# Altium PCB WCH_hairDrierCore_V1.5.PcbDoc (part 6 of 7)
Units mil, origin at the board's own origin, x right, y up, seen from the top; angles counter-clockwise.
Board outline 1683.54 x 992.13 mil, 4 copper layers (Top Layer, Mid-Layer 1, Mid-Layer 2, Bottom Layer); 84 components, 65 nets, 249 pads, 160 vias.
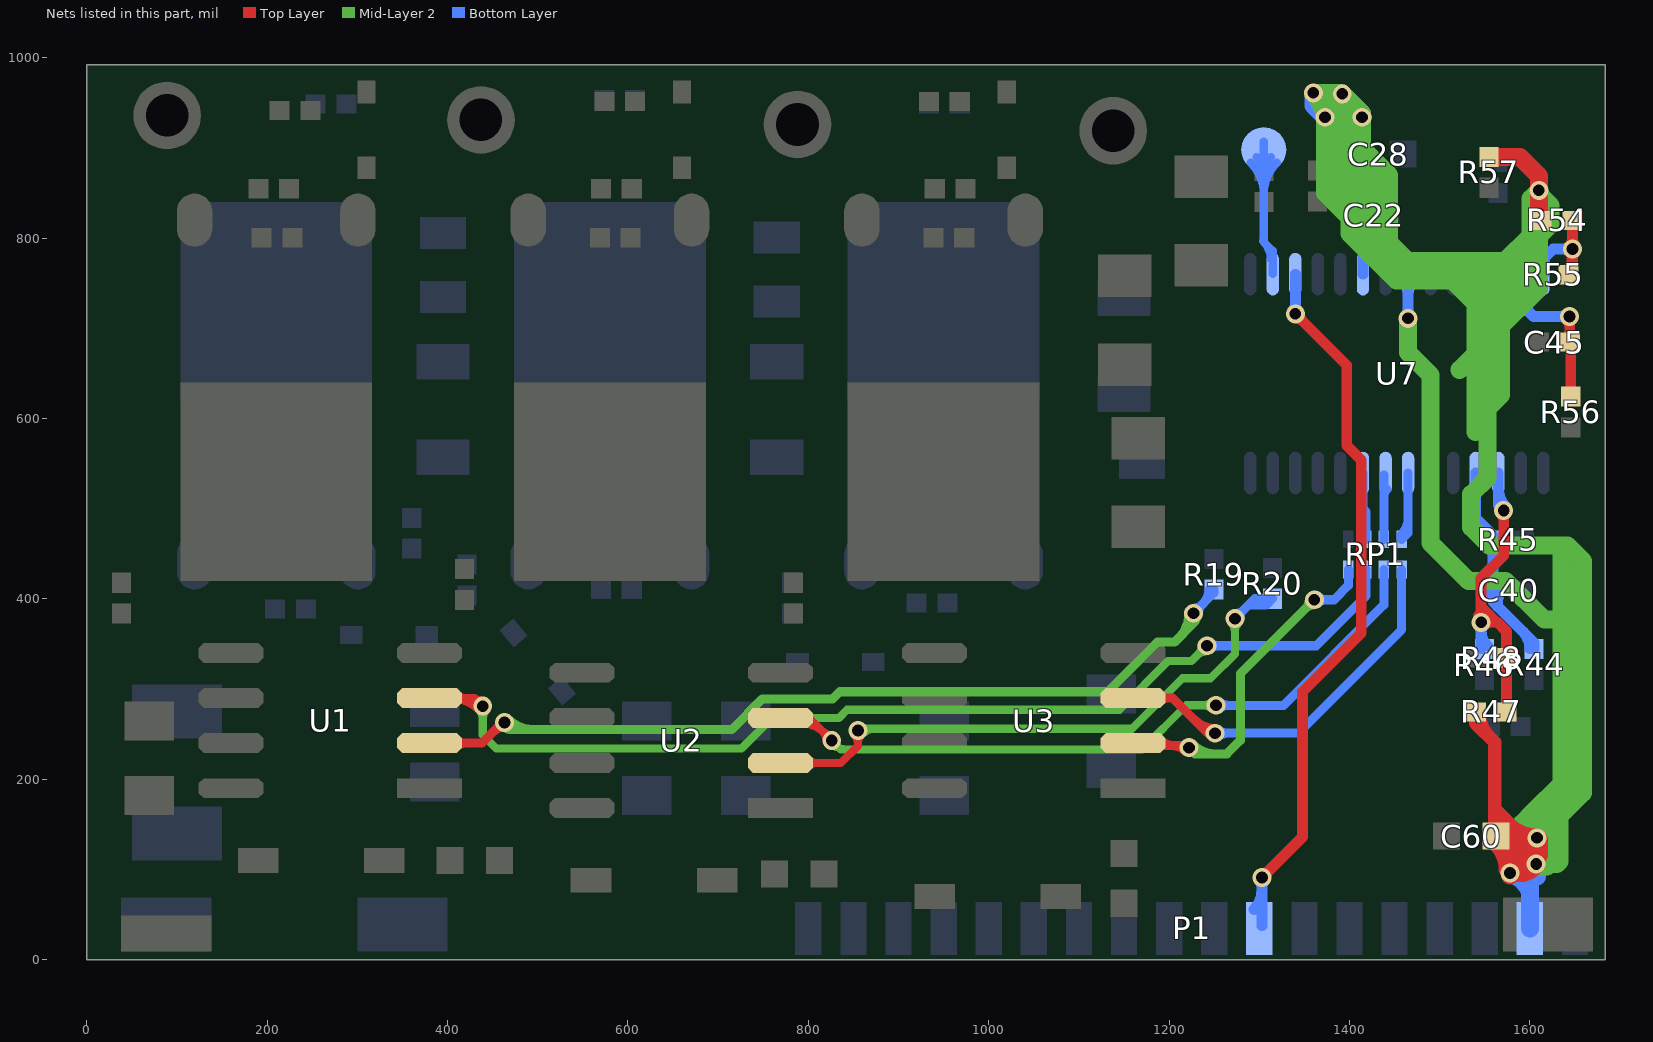
[diagram p8: the nets of this part, all layers, seen from the top]

## Via types
v1: diameter 21, hole 13, Top Layer to Bottom Layer, tented both sides, 155 vias
v2: diameter 25, hole 15, Top Layer to Bottom Layer, tented both sides, 5 vias

## Nets (pads, with @x,y where several pads share a name; then routed paths per layer and width w, separated by ;. In a path a pad name is that pad's centre, name@x,y a point inside that pad or via, vN(x,y) a via of type N, cw(c..) or ccw(c..) an arc to the next point about the centre after c; other vN are vias at no path point) (continued)
NetRP1_2: RP1.2 U7.23 | length 74.9
  Bottom Layer w10: U7.23@1415,539.53 1415,500 1418.53,496.47 RP1.2@1418.53,466.06
NetRP1_3: RP1.3 U7.22 | length 96.7
  Bottom Layer w10: RP1.3@1438.21,466.06 U7.22@1438.21,537.59 ; 1438.21,513.91 cw(c1448.88,513.91) U7.22@1441.34,521.46 ; 1438.21,513.91 cw(c1448.88,513.91) U7.22@1441.34,521.46 ; 1438.21,513.91 cw(c1448.88,513.91) U7.22@1441.34,521.46
NetRP1_4: RP1.4 U7.21 | length 138.7
  Bottom Layer w10: RP1.4@1457.9,466.06 1465,473.16 U7.21@1465,539.53 ; RP1.4@1457.26,470.73 ccw(c1438.57,489.42) 1465,489.42 ; RP1.4@1457.26,470.73 ccw(c1438.57,489.42) 1465,489.42 ; RP1.4@1457.26,470.73 ccw(c1438.57,489.42) 1465,489.42
OPA1_N1: C45.2 R56.2 U7.13 | length 395.9
  Top Layer w12: C45.2@1644.22,684.63 v1@1644.22,713 ; R56.2@1645.37,624.21 C45.2@1645.37,683.47 ; v1@1640.82,709.82 cw(c1632.62,701.62) 1644.22,701.62 ; v1@1640.82,709.82 cw(c1632.62,701.62) 1644.22,701.62 ; v1@1640.82,709.82 cw(c1632.62,701.62) 1644.22,701.62 ; C45.2@1640.94,687.9 ccw(c1633.04,695.81) 1644.22,695.81 ; C45.2@1640.94,687.9 ccw(c1633.04,695.81) 1644.22,695.81 ; C45.2@1640.94,687.9 ccw(c1633.04,695.81) 1644.22,695.81 ; C45.2@1641.45,681.36 cw(c1631.97,671.88) 1645.37,671.88 ; C45.2@1641.45,681.36 cw(c1631.97,671.88) 1645.37,671.88 ; C45.2@1641.45,681.36 cw(c1631.97,671.88) 1645.37,671.88 ; R56.2@1642.1,627.99 ccw(c1634.19,635.9) 1645.37,635.9 ; R56.2@1642.1,627.99 ccw(c1634.19,635.9) 1645.37,635.9 ; R56.2@1642.1,627.99 ccw(c1634.19,635.9) 1645.37,635.9 ; 1644.22,695.81 ccw(c1655.39,695.81) C45.2@1647.49,687.9 ; 1644.22,695.81 ccw(c1655.39,695.81) C45.2@1647.49,687.9 ; 1644.22,695.81 ccw(c1655.39,695.81) C45.2@1647.49,687.9 ; 1645.37,635.9 ccw(c1656.55,635.9) R56.2@1648.64,627.99 ; 1645.37,635.9 ccw(c1656.55,635.9) R56.2@1648.64,627.99 ; 1645.37,635.9 ccw(c1656.55,635.9) R56.2@1648.64,627.99
  Bottom Layer w12: U7.13@1590,760 1590,727 1604,713 v1(1644,713) ; 1633.14,713 cw(c1633.14,702.14) v1@1640.82,709.82 ; 1633.14,713 ccw(c1633.14,723.86) v1@1640.82,716.18 ; 1633.14,713 cw(c1633.14,702.14) v1@1640.82,709.82 ; 1633.14,713 ccw(c1633.14,723.86) v1@1640.82,716.18 ; 1633.14,713 ccw(c1633.14,723.86) v1@1640.82,716.18 ; 1633.14,713 cw(c1633.14,702.14) v1@1640.82,709.82
OPA1_P1: R54.2 R55.1 U7.14 | length 367.2
  Top Layer w12: R55.1@1647.22,763.72 R54.2@1647.22,813.63 ; R55.1@1640.1,762.64 ccw(c1622.91,779.83) v1@1647.22,779.83 ; R55.1@1640.1,762.64 ccw(c1622.91,779.83) v1@1647.22,779.83 ; R55.1@1640.1,762.64 ccw(c1622.91,779.83) v1@1647.22,779.83 ; R54.2@1643.94,816.36 cw(c1636.04,808.45) 1647.22,808.45 ; R54.2@1643.94,816.36 cw(c1636.04,808.45) 1647.22,808.45 ; R54.2@1643.94,816.36 cw(c1636.04,808.45) 1647.22,808.45 ; v1@1644.03,784.82 cw(c1636.35,777.14) 1647.22,777.14 ; v1@1644.03,784.82 cw(c1636.35,777.14) 1647.22,777.14 ; v1@1644.03,784.82 cw(c1636.35,777.14) 1647.22,777.14 ; v1@1644.03,791.18 ccw(c1636.35,798.86) 1647.22,798.86 ; v1@1644.03,791.18 ccw(c1636.35,798.86) 1647.22,798.86 ; v1@1644.03,791.18 ccw(c1636.35,798.86) 1647.22,798.86 ; 1647.22,777.14 cw(c1658.08,777.14) v1@1650.4,784.82 ; 1647.22,777.14 cw(c1658.08,777.14) v1@1650.4,784.82 ; 1647.22,777.14 cw(c1658.08,777.14) v1@1650.4,784.82 ; 1647.22,798.86 ccw(c1658.08,798.86) v1@1650.4,791.18 ; 1647.22,798.86 ccw(c1658.08,798.86) v1@1650.4,791.18 ; 1647.22,798.86 ccw(c1658.08,798.86) v1@1650.4,791.18 ; 1647.22,808.45 cw(c1658.39,808.45) R54.2@1650.49,816.36 ; 1647.22,808.45 cw(c1658.39,808.45) R54.2@1650.49,816.36 ; 1647.22,808.45 cw(c1658.39,808.45) R54.2@1650.49,816.36
  Bottom Layer w12: U7.14@1615,760 1615,777 1626,788 v1(1647.22,788) ; 1636.35,788 cw(c1636.35,777.14) v1@1644.03,784.82 ; 1636.35,788 ccw(c1636.35,798.86) v1@1644.03,791.18 ; 1636.35,788 cw(c1636.35,777.14) v1@1644.03,784.82 ; 1636.35,788 ccw(c1636.35,798.86) v1@1644.03,791.18 ; 1636.35,788 ccw(c1636.35,798.86) v1@1644.03,791.18 ; 1636.35,788 cw(c1636.35,777.14) v1@1644.03,784.82
OPA2_N0: C40.2 R44.2 R45.1 U7.18 | length 596.8
  Bottom Layer w12: U7.18@1540,539.53 1540,489.51 1559.14,470.37 C40.2@1559.14,409 ; C40.2@1559.78,409.63 1559.78,396.22 1565.5,390.5 1604.63,351.37 R44.2@1604.63,344.22 ; 1564,391.59 C40.2@1564,405 ; 1546.83,482.67 cw(c1529.53,465.37) R45.1@1554,465.37 ; 1546.83,482.67 cw(c1529.53,465.37) R45.1@1554,465.37 ; 1546.83,482.67 cw(c1529.53,465.37) R45.1@1554,465.37 ; R45.1@1555.86,462.1 cw(c1547.96,454.19) 1559.13,454.19 ; R45.1@1555.86,462.1 cw(c1547.96,454.19) 1559.13,454.19 ; R45.1@1555.86,462.1 cw(c1547.96,454.19) 1559.13,454.19 ; C40.2@1556.01,412.9 ccw(c1548.45,420.46) 1559.13,420.46 ; C40.2@1556.01,412.9 ccw(c1548.45,420.46) 1559.13,420.46 ; C40.2@1556.01,412.9 ccw(c1548.45,420.46) 1559.13,420.46 ; C40.2@1556.51,406.36 cw(c1548.61,398.45) 1559.78,398.45 ; C40.2@1556.51,406.36 cw(c1548.61,398.45) 1559.78,398.45 ; C40.2@1556.51,406.36 cw(c1548.61,398.45) 1559.78,398.45 ; C40.2@1557.24,406.15 cw(c1544.12,391.21) 1564,391.21 ; C40.2@1557.24,406.15 cw(c1544.12,391.21) 1564,391.21 ; C40.2@1557.24,406.15 cw(c1544.12,391.21) 1564,391.21 ; 1559.13,421.16 ccw(c1570.81,421.16) C40.2@1562.55,412.9 ; 1559.13,421.16 ccw(c1570.81,421.16) C40.2@1562.55,412.9 ; 1559.13,421.16 ccw(c1570.81,421.16) C40.2@1562.55,412.9 ; 1559.14,454.19 cw(c1570.31,454.19) R45.1@1562.41,462.1 ; 1559.14,454.19 cw(c1570.31,454.19) R45.1@1562.41,462.1 ; 1559.14,454.19 cw(c1570.31,454.19) R45.1@1562.41,462.1 ; 1559.78,397.23 cw(c1572.69,397.23) C40.2@1563.56,406.36 ; 1559.78,397.23 cw(c1572.69,397.23) C40.2@1563.56,406.36 ; 1559.78,397.23 cw(c1572.69,397.23) C40.2@1563.56,406.36 ; 1559.78,398.45 cw(c1570.96,398.45) C40.2@1563.06,406.36 ; 1559.78,398.45 cw(c1570.96,398.45) C40.2@1563.06,406.36 ; 1559.78,398.45 cw(c1570.96,398.45) C40.2@1563.06,406.36 ; 1592.02,363.98 cw(c1572.77,344.72) R44.2@1600,344.72 ; 1592.02,363.98 cw(c1572.77,344.72) R44.2@1600,344.72 ; 1592.02,363.98 cw(c1572.77,344.72) R44.2@1600,344.72
OPA2_P1: R46.2 R47.2 R48.2 U7.17 | length 897.9
  Top Layer w12: 1563,374 1546,391 ; v1(1571,498) 1571,448 1546,423 1546,391 ; R47.2@1574.22,274.63 R48.2@1574.22,334.63 1574.22,363.78 1564,374 v1(1546,374) 1546,391 ; v1@1542.82,377.18 ccw(c1535.14,384.86) 1546,384.86 ; v1@1542.82,377.18 ccw(c1535.14,384.86) 1546,384.86 ; v1@1542.82,377.18 ccw(c1535.14,384.86) 1546,384.86 ; v1@1542.95,380.85 cw(c1548.87,367.56) 1559.15,377.85 ; v1@1542.95,380.85 cw(c1548.87,367.56) 1559.15,377.85 ; v1@1542.95,380.85 cw(c1548.87,367.56) 1559.15,377.85 ; 1546,384.86 ccw(c1556.86,384.86) v1@1549.18,377.18 ; 1546,384.86 ccw(c1556.86,384.86) v1@1549.18,377.18 ; 1546,384.86 ccw(c1556.86,384.86) v1@1549.18,377.18 ; v1@1549.18,370.82 cw(c1556.86,363.14) 1556.86,374 ; v1@1549.18,370.82 cw(c1556.86,363.14) 1556.86,374 ; v1@1549.18,370.82 cw(c1556.86,363.14) 1556.86,374 ; v1@1549.18,377.18 ccw(c1556.86,384.86) 1556.86,374 ; v1@1549.18,377.18 ccw(c1556.86,384.86) 1556.86,374 ; v1@1549.18,377.18 ccw(c1556.86,384.86) 1556.86,374 ; v1@1567.82,494.82 cw(c1560.14,487.14) 1571,487.14 ; v1@1567.82,494.82 cw(c1560.14,487.14) 1571,487.14 ; v1@1567.82,494.82 cw(c1560.14,487.14) 1571,487.14 ; R47.2@1570.94,277.9 ccw(c1563.04,285.81) 1574.22,285.81 ; R47.2@1570.94,277.9 ccw(c1563.04,285.81) 1574.22,285.81 ; R47.2@1570.94,277.9 ccw(c1563.04,285.81) 1574.22,285.81 ; R48.2@1570.94,331.36 cw(c1563.04,323.45) 1574.22,323.45 ; R48.2@1570.94,331.36 cw(c1563.04,323.45) 1574.22,323.45 ; R48.2@1570.94,331.36 cw(c1563.04,323.45) 1574.22,323.45 ; R48.2@1570.94,337.9 ccw(c1563.04,345.81) 1574.22,345.81 ; R48.2@1570.94,337.9 ccw(c1563.04,345.81) 1574.22,345.81 ; R48.2@1570.94,337.9 ccw(c1563.04,345.81) 1574.22,345.81 ; 1571,487.14 cw(c1581.86,487.14) v1@1574.18,494.82 ; 1571,487.14 cw(c1581.86,487.14) v1@1574.18,494.82 ; 1571,487.14 cw(c1581.86,487.14) v1@1574.18,494.82 ; 1574.22,285.81 ccw(c1585.39,285.81) R47.2@1577.49,277.9 ; 1574.22,285.81 ccw(c1585.39,285.81) R47.2@1577.49,277.9 ; 1574.22,285.81 ccw(c1585.39,285.81) R47.2@1577.49,277.9 ; 1574.22,323.45 cw(c1585.39,323.45) R48.2@1577.49,331.36 ; 1574.22,323.45 cw(c1585.39,323.45) R48.2@1577.49,331.36 ; 1574.22,323.45 cw(c1585.39,323.45) R48.2@1577.49,331.36 ; 1574.22,345.81 ccw(c1585.39,345.81) R48.2@1577.49,337.9 ; 1574.22,345.81 ccw(c1585.39,345.81) R48.2@1577.49,337.9 ; 1574.22,345.81 ccw(c1585.39,345.81) R48.2@1577.49,337.9
  Bottom Layer w12: R46.2@1546,344.85 v1(1546,374) ; U7.17@1565,539.53 1565,504 v1(1571,498) ; v1@1542.82,370.82 cw(c1535.14,363.14) 1546,363.14 ; v1@1542.82,370.82 cw(c1535.14,363.14) 1546,363.14 ; v1@1542.82,370.82 cw(c1535.14,363.14) 1546,363.14 ; 1546,363.14 cw(c1556.86,363.14) v1@1549.18,370.82 ; 1546,363.14 cw(c1556.86,363.14) v1@1549.18,370.82 ; 1546,363.14 cw(c1556.86,363.14) v1@1549.18,370.82 ; v1@1546,364.66 ccw(c1569.57,364.66) R46.2@1552.9,347.99 ; v1@1546,364.66 ccw(c1569.57,364.66) R46.2@1552.9,347.99 ; v1@1546,364.66 ccw(c1569.57,364.66) R46.2@1552.9,347.99 ; U7.17@1565,523.35 ccw(c1596.35,523.35) v1@1574.18,501.18 ; U7.17@1565,523.35 ccw(c1596.35,523.35) v1@1574.18,501.18 ; U7.17@1565,523.35 ccw(c1596.35,523.35) v1@1574.18,501.18
PWM1_BREAK_IN: U7.20
PWM1_CH1_A+: RP1.8 U3.2 | length 707.6
  Top Layer w10: U3.2@1162.82,237.18 v1@1219.82,237.18 ; v1@1213,237 v1(1222,235) ; U3.2@1189.24,244.24 ccw(c1206.28,261.28) 1206.28,237.18 ; U3.2@1189.24,244.24 ccw(c1206.28,261.28) 1206.28,237.18 ; U3.2@1189.24,244.24 ccw(c1206.28,261.28) 1206.28,237.18 ; 1203.45,237.19 cw(c1203.45,216.45) v1@1218.11,231.11 ; 1203.45,237.19 cw(c1203.45,216.45) v1@1218.11,231.11 ; 1203.45,237.19 cw(c1203.45,216.45) v1@1218.11,231.11
  Mid-Layer 2 w10: v1(1222,235) 1229,228 1264,228 1279,243 1279,244 1279,317 ; 1279,312 1279,317 ; v1(1361,399) 1279,317 ; v1@1225.89,238.89 ccw(c1252.18,265.18) 1252.18,228 ; v1@1225.89,238.89 ccw(c1252.18,265.18) 1252.18,228 ; v1@1225.89,238.89 ccw(c1252.18,265.18) 1252.18,228 ; 1351.61,389.61 cw(c1361,380.22) v1@1361,393.5 ; 1351.61,389.61 ccw(c1342.22,399) v1@1355.5,399 ; 1351.61,389.61 cw(c1361,380.22) v1@1361,393.5 ; 1351.61,389.61 ccw(c1342.22,399) v1@1355.5,399 ; 1351.61,389.61 ccw(c1342.22,399) v1@1355.5,399 ; 1351.61,389.61 cw(c1361,380.22) v1@1361,393.5
  Bottom Layer w10: v1(1361,399) 1383,399 1398.84,414.84 RP1.8@1398.84,432.4 ; v1@1364.89,395.11 cw(c1374.28,385.72) 1374.28,399 ; v1@1364.89,395.11 cw(c1374.28,385.72) 1374.28,399 ; v1@1364.89,395.11 cw(c1374.28,385.72) 1374.28,399 ; v1@1364.89,402.89 ccw(c1374.28,412.28) 1374.28,399 ; v1@1364.89,402.89 ccw(c1374.28,412.28) 1374.28,399 ; v1@1364.89,402.89 ccw(c1374.28,412.28) 1374.28,399
PWM1_CH1N_A-: RP1.5 U3.3 | length 635.8
  Top Layer w10: U3.3@1160,290 1204,290 1243,251 v1(1251,251) ; U3.3@1189.24,285.76 cw(c1199.49,275.51) 1199.49,290 ; U3.3@1189.24,285.76 cw(c1199.49,275.51) 1199.49,290 ; U3.3@1189.24,285.76 cw(c1199.49,275.51) 1199.49,290 ; U3.3@1189.24,294.24 ccw(c1199.49,304.49) 1199.49,290 ; U3.3@1189.24,294.24 ccw(c1199.49,304.49) 1199.49,290 ; U3.3@1189.24,294.24 ccw(c1199.49,304.49) 1199.49,290 ; 1227.95,266.05 ccw(c1251,289.09) v1@1251,256.5 ; 1227.95,266.05 ccw(c1251,289.09) v1@1251,256.5 ; 1227.95,266.05 ccw(c1251,289.09) v1@1251,256.5
  Bottom Layer w10: v1(1251,251) 1343,251 1457.9,365.9 RP1.5@1457.9,432.4 ; v1@1254.89,247.11 cw(c1264.28,237.72) 1264.28,251 ; v1@1254.89,247.11 cw(c1264.28,237.72) 1264.28,251 ; v1@1254.89,247.11 cw(c1264.28,237.72) 1264.28,251 ; v1@1254.89,254.89 ccw(c1264.28,264.28) 1264.28,251 ; v1@1254.89,254.89 ccw(c1264.28,264.28) 1264.28,251 ; v1@1254.89,254.89 ccw(c1264.28,264.28) 1264.28,251
PWM1_CH2_B+: R20.1 U2.2 | length 1201.3
  Top Layer w9: U2.2@769,218 836,218 855,237 v1(855,254) ; U2.2@798.6,213.4 cw(c809.69,202.31) 809.69,218 ; U2.2@798.6,213.4 cw(c809.69,202.31) 809.69,218 ; U2.2@798.6,213.4 cw(c809.69,202.31) 809.69,218 ; U2.2@798.6,222.6 ccw(c809.69,233.69) 809.69,218 ; U2.2@798.6,222.6 ccw(c809.69,233.69) 809.69,218 ; U2.2@798.6,222.6 ccw(c809.69,233.69) 809.69,218 ; v1@850.76,249.76 cw(c840.51,239.51) 855,239.51 ; v1@850.76,249.76 cw(c840.51,239.51) 855,239.51 ; v1@850.76,249.76 cw(c840.51,239.51) 855,239.51 ; 855,239.51 cw(c869.49,239.51) v1@859.24,249.76 ; 855,239.51 cw(c869.49,239.51) v1@859.24,249.76 ; 855,239.51 cw(c869.49,239.51) v1@859.24,249.76
  Mid-Layer 2 w9: v1@855,253 858,256 1159,256 1215,312 1246,312 1273,339 v1(1273,378) ; v1@859.24,249.76 cw(c874.31,234.69) 874.31,256 ; v1@859.24,249.76 cw(c874.31,234.69) 874.31,256 ; v1@859.24,249.76 cw(c874.31,234.69) 874.31,256 ; v1@1268.76,373.76 cw(c1258.51,363.51) 1273,363.51 ; v1@1268.76,373.76 cw(c1258.51,363.51) 1273,363.51 ; v1@1268.76,373.76 cw(c1258.51,363.51) 1273,363.51 ; 1273,363.51 cw(c1287.49,363.51) v1@1277.24,373.76 ; 1273,363.51 cw(c1287.49,363.51) v1@1277.24,373.76 ; 1273,363.51 cw(c1287.49,363.51) v1@1277.24,373.76
  Bottom Layer w10: v1(1273,378) 1288,393 ; v1@1273,383.5 ccw(c1273,396.78) 1282.39,387.39 ; v1@1273,383.5 ccw(c1273,396.78) 1282.39,387.39 ; v1@1273,383.5 ccw(c1273,396.78) 1282.39,387.39 ; v1@1278.5,378 cw(c1291.78,378) 1282.39,387.39 ; v1@1278.5,378 cw(c1291.78,378) 1282.39,387.39 ; v1@1278.5,378 cw(c1291.78,378) 1282.39,387.39 ; 1288,393 1295.14,400.13 ; 1288,393 1297.49,393 ; 1295.14,400.13 1304.63,400.13 1297.49,393 ; 1295.14,400.13 R20.1@1314.63,400.13 1307.49,393 1297.49,393 ; 1297.5,393 ccw(c1297.5,405.47) R20.1@1309.3,401.45 ; 1297.5,393 ccw(c1297.5,405.47) R20.1@1309.3,401.45 ; 1297.5,393 ccw(c1297.5,405.47) R20.1@1309.3,401.45 ; 1301.04,400.13 cw(c1301.04,386.54) R20.1@1310.65,396.15 ; 1301.04,400.14 ccw(c1301.04,413.73) R20.1@1310.65,404.12 ; 1301.04,400.13 cw(c1301.04,386.54) R20.1@1310.65,396.15 ; 1301.04,400.14 ccw(c1301.04,413.73) R20.1@1310.65,404.12 ; 1301.04,400.13 cw(c1301.04,386.54) R20.1@1310.65,396.15 ; 1301.04,400.14 ccw(c1301.04,413.73) R20.1@1310.65,404.12 ; 1301.04,400.13 cw(c1301.04,386.54) R20.1@1310.65,396.15 ; 1301.04,400.14 ccw(c1301.04,413.73) R20.1@1310.65,404.12 ; 1301.04,400.14 ccw(c1301.04,413.73) R20.1@1310.65,404.12 ; 1301.04,400.13 cw(c1301.04,386.54) R20.1@1310.65,396.15 ; 1301.04,400.14 ccw(c1301.04,413.73) R20.1@1310.65,404.12 ; 1301.04,400.13 cw(c1301.04,386.54) R20.1@1310.65,396.15
PWM1_CH2N_B-: RP1.6 U2.3 | length 1090.3
  Top Layer w9: U2.3@769,268 801,268 v1(826,243) ; U2.3@794,261.5 cw(c794,228.91) 817.05,251.95 ; U2.3@794,261.5 cw(c794,228.91) 817.05,251.95 ; U2.3@794,261.5 cw(c794,228.91) 817.05,251.95 ; 815.76,253.24 cw(c805.51,243) v1@820,243 ; 815.76,253.24 ccw(c826,263.49) v1@826,249 ; 815.76,253.24 cw(c805.51,243) v1@820,243 ; 815.76,253.24 ccw(c826,263.49) v1@826,249 ; 815.76,253.24 ccw(c826,263.49) v1@826,249 ; 815.76,253.24 cw(c805.51,243) v1@820,243
  Mid-Layer 2 w9: v1@823.88,240.88 ccw(c842.9,259.9) 842.9,233 ; v1(826,243) 836,233 1170,233 1219,282 v1(1252,282) ; 1237.51,282 cw(c1237.51,267.51) v1@1247.76,277.76 ; 1237.51,282 ccw(c1237.51,296.49) v1@1247.76,286.24 ; 1237.51,282 cw(c1237.51,267.51) v1@1247.76,277.76 ; 1237.51,282 ccw(c1237.51,296.49) v1@1247.76,286.24 ; 1237.51,282 ccw(c1237.51,296.49) v1@1247.76,286.24 ; 1237.51,282 cw(c1237.51,267.51) v1@1247.76,277.76
  Bottom Layer w9: v1@822,243 v1(826,243)
  Bottom Layer w10: v1(1252,282) 1327,282 1438.21,393.21 RP1.6@1438.21,432.4 ; v1@1255.89,278.11 cw(c1265.28,268.72) 1265.28,282 ; v1@1255.89,278.11 cw(c1265.28,268.72) 1265.28,282 ; v1@1255.89,278.11 cw(c1265.28,268.72) 1265.28,282 ; v1@1255.89,285.89 ccw(c1265.28,295.28) 1265.28,282 ; v1@1255.89,285.89 ccw(c1265.28,295.28) 1265.28,282 ; v1@1255.89,285.89 ccw(c1265.28,295.28) 1265.28,282
PWM1_CH3_C+: R19.1 U1.2 | length 1476.1
  Top Layer w10: U1.2@380,240 438,240 v1@459,261 ; U1.2@409.24,235.76 cw(c419.49,225.51) 419.49,240 ; U1.2@409.24,235.76 cw(c419.49,225.51) 419.49,240 ; U1.2@409.24,235.76 cw(c419.49,225.51) 419.49,240 ; U1.2@409.24,244.24 ccw(c419.49,254.49) 419.49,240 ; U1.2@409.24,244.24 ccw(c419.49,254.49) 419.49,240 ; U1.2@409.24,244.24 ccw(c419.49,254.49) 419.49,240 ; 450.2,252.2 cw(c463,239.39) v1@463,257.5 ; 450.2,252.2 cw(c463,239.39) v1@463,257.5 ; 450.2,252.2 cw(c463,239.39) v1@463,257.5
  Mid-Layer 2 w10: v1(463,263) 471,255 715,255 749,289 827,289 835,297 1132,297 1187,352 1206,352 1227,373 ; v1(1227,384) 1227,373 ; v1@459.82,259.82 ccw(c471.45,271.45) 471.45,255 ; v1@459.82,259.82 ccw(c471.45,271.45) 471.45,255 ; v1@459.82,259.82 ccw(c471.45,271.45) 471.45,255 ; v1@466.89,266.89 ccw(c495.59,295.59) 495.59,255 ; v1@466.89,266.89 ccw(c495.59,295.59) 495.59,255 ; v1@466.89,266.89 ccw(c495.59,295.59) 495.59,255 ; 1211.5,357.5 ccw(c1187.21,381.79) v1@1221.51,383.69 ; 1211.5,357.5 ccw(c1187.21,381.79) v1@1221.51,383.69 ; 1211.5,357.5 ccw(c1187.21,381.79) v1@1221.51,383.69 ; v1@1223.7,379.6 cw(c1218.75,373) 1227,373 ; v1@1223.7,379.6 cw(c1218.75,373) 1227,373 ; v1@1223.7,379.6 cw(c1218.75,373) 1227,373 ; 1227,373 cw(c1235.25,373) v1@1230.3,379.6 ; 1227,373 cw(c1235.25,373) v1@1230.3,379.6 ; 1227,373 cw(c1235.25,373) v1@1230.3,379.6 ; 1227.32,373.32 ccw(c1217.18,383.45) v1@1231.49,384.25 ; 1227.32,373.32 ccw(c1217.18,383.45) v1@1231.49,384.25 ; 1227.32,373.32 ccw(c1217.18,383.45) v1@1231.49,384.25
  Bottom Layer w10: v1(1227,384) 1249.63,406.63 R19.1@1249.63,410.13 ; v1@1227,389.5 ccw(c1227,402.78) 1236.39,393.39 ; v1@1227,389.5 ccw(c1227,402.78) 1236.39,393.39 ; v1@1227,389.5 ccw(c1227,402.78) 1236.39,393.39 ; v1@1232.5,384 cw(c1245.78,384) 1236.39,393.39 ; v1@1232.5,384 cw(c1245.78,384) 1236.39,393.39 ; v1@1232.5,384 cw(c1245.78,384) 1236.39,393.39 ; 1237.9,394.9 ccw(c1223.17,409.63) R19.1@1244,409.63 ; 1237.9,394.9 ccw(c1223.17,409.63) R19.1@1244,409.63 ; 1237.9,394.9 ccw(c1223.17,409.63) R19.1@1244,409.63
PWM1_CH3N_C-: RP1.7 U1.3 | length 1614.5
  Top Layer w9: U1.3@380,290 430,290 v1(439,281) ; U1.3@402.79,290 cw(c402.79,244.79) v1@434.76,276.76 ; U1.3@402.79,290 cw(c402.79,244.79) v1@434.76,276.76 ; U1.3@402.79,290 cw(c402.79,244.79) v1@434.76,276.76 ; U1.3@409.6,285.4 cw(c420.69,274.31) 420.69,290 ; U1.3@409.6,285.4 cw(c420.69,274.31) 420.69,290 ; U1.3@409.6,285.4 cw(c420.69,274.31) 420.69,290 ; U1.3@409.6,294.6 ccw(c420.69,305.69) 420.69,290 ; U1.3@409.6,294.6 ccw(c420.69,305.69) 420.69,290 ; U1.3@409.6,294.6 ccw(c420.69,305.69) 420.69,290 ; 424.51,290 cw(c424.51,266.51) v1@441.12,283.12 ; 424.51,290 cw(c424.51,266.51) v1@441.12,283.12 ; 424.51,290 cw(c424.51,266.51) v1@441.12,283.12
  Mid-Layer 2 w9: v1(439,281) 439,249 454,234 726,234 760,268 834,268 843,277 1130,277 1145,277 1199,331 1225,331 v1(1242,348) ; v1@434.76,276.76 cw(c424.51,266.51) 439,266.51 ; v1@434.76,276.76 cw(c424.51,266.51) 439,266.51 ; v1@434.76,276.76 cw(c424.51,266.51) 439,266.51 ; 439,266.51 cw(c453.49,266.51) v1@443.24,276.76 ; 439,266.51 cw(c453.49,266.51) v1@443.24,276.76 ; 439,266.51 cw(c453.49,266.51) v1@443.24,276.76 ; 1231.76,337.76 cw(c1242,327.51) v1@1242,342 ; 1231.76,337.76 ccw(c1221.51,348) v1@1236,348 ; 1231.76,337.76 cw(c1242,327.51) v1@1242,342 ; 1231.76,337.76 ccw(c1221.51,348) v1@1236,348 ; 1231.76,337.76 ccw(c1221.51,348) v1@1236,348 ; 1231.76,337.76 cw(c1242,327.51) v1@1242,342
  Bottom Layer w10: v1(1242,348) 1363,348 1418.53,403.53 RP1.7@1418.53,432.4 ; v1@1245.89,344.11 cw(c1255.28,334.72) 1255.28,348 ; v1@1245.89,344.11 cw(c1255.28,334.72) 1255.28,348 ; v1@1245.89,344.11 cw(c1255.28,334.72) 1255.28,348 ; v1@1245.89,351.89 ccw(c1255.28,361.28) 1255.28,348 ; v1@1245.89,351.89 ccw(c1255.28,361.28) 1255.28,348 ; v1@1245.89,351.89 ccw(c1255.28,361.28) 1255.28,348
SW_WARN: P1.8 U7.3 | length 1075.6
  Top Layer w12: v1(1303,91) 1348,136 1348,297 1413,362 1413,554 1397,570 1397,659 v1(1340,716) ; v1@1303,95.5 ccw(c1303,106.36) 1310.68,98.68 ; v1@1303,95.5 ccw(c1303,106.36) 1310.68,98.68 ; v1@1303,95.5 ccw(c1303,106.36) 1310.68,98.68 ; v1@1307.5,91 cw(c1318.36,91) 1310.68,98.68 ; v1@1307.5,91 cw(c1318.36,91) 1310.68,98.68 ; v1@1307.5,91 cw(c1318.36,91) 1310.68,98.68 ; v1@1340,711.5 cw(c1340,700.64) 1347.68,708.32 ; v1@1340,711.5 cw(c1340,700.64) 1347.68,708.32 ; v1@1340,711.5 cw(c1340,700.64) 1347.68,708.32 ; v1@1344.5,716 ccw(c1355.36,716) 1347.68,708.32 ; v1@1344.5,716 ccw(c1355.36,716) 1347.68,708.32 ; v1@1344.5,716 ccw(c1355.36,716) 1347.68,708.32
  Bottom Layer w12: P1.8@1303,37.57 v1(1303,91) ; v1(1340,716) U7.3@1340,760 ; P1.8@1293.98,55.63 ccw(c1272.21,77.4) 1303,77.4 ; P1.8@1293.98,55.63 ccw(c1272.21,77.4) 1303,77.4 ; P1.8@1293.98,55.63 ccw(c1272.21,77.4) 1303,77.4 ; v1@1299.82,87.82 cw(c1292.14,80.14) 1303,80.14 ; v1@1299.82,87.82 cw(c1292.14,80.14) 1303,80.14 ; v1@1299.82,87.82 cw(c1292.14,80.14) 1303,80.14 ; 1303,80.14 cw(c1313.86,80.14) v1@1306.18,87.82 ; 1303,80.14 cw(c1313.86,80.14) v1@1306.18,87.82 ; 1303,80.14 cw(c1313.86,80.14) v1@1306.18,87.82 ; v1@1336.82,719.18 ccw(c1329.14,726.86) 1340,726.86 ; v1@1336.82,719.18 ccw(c1329.14,726.86) 1340,726.86 ; v1@1336.82,719.18 ccw(c1329.14,726.86) 1340,726.86 ; 1340,726.86 ccw(c1350.86,726.86) v1@1343.18,719.18 ; 1340,726.86 ccw(c1350.86,726.86) v1@1343.18,719.18 ; 1340,726.86 ccw(c1350.86,726.86) v1@1343.18,719.18
UART_TX: pad.0@1305,898 U7.2 | length 581.5
  Bottom Layer w9: pad.0@1305,907 1305,796 1315,786 U7.2@1315,760 ; pad.0@1290.5,883.5 cw(c1255.51,848.51) 1305,848.51 ; pad.0@1290.5,883.5 cw(c1255.51,848.51) 1305,848.51 ; pad.0@1290.5,883.5 cw(c1255.51,848.51) 1305,848.51 ; pad.0@1296.87,889.87 cw(c1277.24,870.24) 1305,870.24 ; pad.0@1296.87,889.87 cw(c1277.24,870.24) 1305,870.24 ; pad.0@1296.87,889.87 cw(c1277.24,870.24) 1305,870.24 ; 1304.37,796.63 cw(c1284.47,776.73) U7.2@1312.61,776.73 ; 1304.37,796.63 cw(c1284.47,776.73) U7.2@1312.61,776.73 ; 1304.37,796.63 cw(c1284.47,776.73) U7.2@1312.61,776.73 ; 1305,848.51 cw(c1354.49,848.51) pad.0@1319.5,883.5 ; 1305,848.51 cw(c1354.49,848.51) pad.0@1319.5,883.5 ; 1305,848.51 cw(c1354.49,848.51) pad.0@1319.5,883.5 ; 1305,870.24 cw(c1332.76,870.24) pad.0@1313.13,889.87 ; 1305,870.24 cw(c1332.76,870.24) pad.0@1313.13,889.87 ; 1305,870.24 cw(c1332.76,870.24) pad.0@1313.13,889.87
V3.3: C22.1 C28.1 C60.1 P1.2 R47.1 R54.1 R57.1 U7.6 U7.8 | length 11239.5
  Top Layer w15: R47.1@1540.14,274.63 1540.14,261.87 1561,241 1561,210 1561,167 ; C60.1@1561,138.5 1561,167 ; v1(1578,96) 1573,101 1573,126.5 C60.1@1562.5,137 v1@1606,137 ; 1599.75,126.25 1599.75,128.25 1561,167 ; R47.1@1543.77,274.52 ccw(c1580,273.27) 1554.36,247.64 ; R47.1@1543.77,274.52 ccw(c1580,273.27) 1554.36,247.64 ; R47.1@1543.77,274.52 ccw(c1580,273.27) 1554.36,247.64 ; C60.1@1557.81,131.15 cw(c1532.44,99.5) v1@1573,99.5 ; C60.1@1557.81,131.15 cw(c1532.44,99.5) v1@1573,99.5 ; C60.1@1557.81,131.15 cw(c1532.44,99.5) v1@1573,99.5 ; 1561,158.73 ccw(c1584.23,158.73) C60.1@1567.8,142.3 ; 1561,158.73 ccw(c1584.23,158.73) C60.1@1567.8,142.3 ; 1561,158.73 ccw(c1584.23,158.73) C60.1@1567.8,142.3 ; C60.1@1561.15,144.38 cw(c1567.78,108.2) 1593.79,134.21 ; C60.1@1561.15,144.38 cw(c1567.78,108.2) 1593.79,134.21 ; C60.1@1561.15,144.38 cw(c1567.78,108.2) 1593.79,134.21 ; 1563.02,164.98 cw(c1542.72,144.67) C60.1@1569.49,134.29 ; 1563.02,164.98 cw(c1542.72,144.67) C60.1@1569.49,134.29 ; 1563.02,164.98 cw(c1542.72,144.67) C60.1@1569.49,134.29 ; C60.1@1567.8,131.7 cw(c1580.61,118.89) 1580.61,137 ; C60.1@1567.8,131.7 cw(c1580.61,118.89) 1580.61,137 ; C60.1@1567.8,131.7 cw(c1580.61,118.89) 1580.61,137 ; C60.1@1567.8,142.3 ccw(c1580.61,155.11) 1580.61,137 ; C60.1@1567.8,142.3 ccw(c1580.61,155.11) 1580.61,137 ; C60.1@1567.8,142.3 ccw(c1580.61,155.11) 1580.61,137 ; 1573,115.31 ccw(c1597.31,115.31) v1@1580.12,98.12 ; 1573,115.31 ccw(c1597.31,115.31) v1@1580.12,98.12 ; 1573,115.31 ccw(c1597.31,115.31) v1@1580.12,98.12 ; C60.1@1577.27,150.73 ccw(c1608,181.46) v1@1608,138 ; C60.1@1577.27,150.73 ccw(c1608,181.46) v1@1608,138 ; C60.1@1577.27,150.73 ccw(c1608,181.46) v1@1608,138 ; 1595.93,137 cw(c1595.93,122.93) v1@1605.88,132.88 ; 1595.93,137 cw(c1595.93,122.93) v1@1605.88,132.88 ; 1595.93,137 cw(c1595.93,122.93) v1@1605.88,132.88
  Top Layer w20: R57.1@1554.63,889.87 1589.14,889.87 1610,869 v1(1610,853) R54.1@1610,822.77 ; C60.1@1562.5,142 1578.25,126.25 ; 1592.5,112 1578.25,126.25 ; v1(1608,135) 1610,133 v1@1610,116 ; C60.1@1559.29,133.16 cw(c1525.9,93.17) v1@1578,93.17 ; C60.1@1559.29,133.16 cw(c1525.9,93.17) v1@1578,93.17 ; C60.1@1559.29,133.16 cw(c1525.9,93.17) v1@1578,93.17 ; C60.1@1562.5,132 cw(c1562.5,107.86) 1579.57,124.93 ; C60.1@1562.5,132 cw(c1562.5,107.86) 1579.57,124.93 ; C60.1@1562.5,132 cw(c1562.5,107.86) 1579.57,124.93 ; C60.1@1562.5,132 cw(c1562.5,107.86) 1579.57,124.93 ; C60.1@1562.5,132 cw(c1562.5,107.86) 1579.57,124.93 ; C60.1@1562.5,132 cw(c1562.5,107.86) 1579.57,124.93 ; C60.1@1562.5,132 cw(c1562.5,107.86) 1579.57,124.93 ; C60.1@1562.5,132 cw(c1562.5,107.86) 1579.57,124.93 ; C60.1@1562.5,132 cw(c1562.5,107.86) 1579.57,124.93 ; C60.1@1566.09,140.48 ccw(c1599.75,173.17) 1599.75,126.25 ; C60.1@1566.09,140.48 ccw(c1599.75,173.17) 1599.75,126.25 ; C60.1@1566.09,140.48 ccw(c1599.75,173.17) 1599.75,126.25 ; C60.1@1572.12,148.51 cw(c1561.61,135.93) 1578,135.93 ; C60.1@1572.12,148.51 cw(c1561.61,135.93) 1578,135.93 ; C60.1@1572.12,148.51 cw(c1561.61,135.93) 1578,135.93 ; v1@1578,96.5 ccw(c1578,126.68) v1@1599.34,105.34 ; v1@1578,96.5 ccw(c1578,126.68) v1@1599.34,105.34 ; v1@1578,96.5 ccw(c1578,126.68) v1@1599.34,105.34 ; 1578.25,126.25 1578,126 v1(1578,96) 1590,96 ; 1578.25,126.25 1599.75,126.25 ; v1@1581.65,96 ccw(c1581.65,131.35) v1@1606.65,106.35 ; v1@1581.65,96 ccw(c1581.65,131.35) v1@1606.65,106.35 ; v1@1581.65,96 ccw(c1581.65,131.35) v1@1606.65,106.35 ; 1585.67,126.25 ccw(c1585.67,157.33) v1@1607.65,135.35 ; 1585.67,126.25 ccw(c1585.67,157.33) v1@1607.65,135.35 ; 1585.67,126.25 ccw(c1585.67,157.33) v1@1607.65,135.35 ; 1590,96 ccw(c1590,114.51) v1@1606.55,106.22 ; 1590,96 ccw(c1590,114.51) v1@1606.55,106.22 ; 1590,96 ccw(c1590,114.51) v1@1606.55,106.22 ; 1590,96 v1@1610,116 ; 1591.64,112.86 ccw(c1607,128.23) v1@1607,106.5 ; 1591.64,112.86 ccw(c1607,128.23) v1@1607,106.5 ; 1591.64,112.86 ccw(c1607,128.23) v1@1607,106.5 ; 1594.2,100.2 cw(c1607,87.39) v1@1607,105.5 ; 1594.2,100.2 cw(c1607,87.39) v1@1607,105.5 ; 1594.2,100.2 cw(c1607,87.39) v1@1607,105.5 ; 1596.95,129.05 cw(c1573.91,106) v1@1606.5,106 ; 1596.95,129.05 cw(c1573.91,106) v1@1606.5,106 ; 1596.95,129.05 cw(c1573.91,106) v1@1606.5,106 ; 1599.75,126.25 v1@1610,116 ; v1@1600.5,106.5 ccw(c1580.5,126.5) v1@1607.52,134.85 ; v1@1600.5,106.5 ccw(c1580.5,126.5) v1@1607.52,134.85 ; v1@1600.5,106.5 ccw(c1580.5,126.5) v1@1607.52,134.85
  Mid-Layer 2 w20: v1@1359.65,960.65 cw(c1327.41,928.41) v1@1373,928.41 ; v1@1359.85,960.52 cw(c1354.23,942.62) v1@1373,942.62 ; v1@1362.25,958.75 cw(c1337.49,934) v1@1372.5,934 ; v1@1372.65,933.65 cw(c1325.92,886.92) 1392,886.92 ; v1@1372.86,934.48 ccw(c1365.42,960) v1(1392,960) 1392,935 ; v1@1373,933.5 cw(c1373,884.01) 1408,919 ; v1(1373,934) v1(1414,934) ; v1@1373.11,933.51 cw(c1379.74,902.75) 1402,925 ; 1400,899.99 cw(c1446.64,899.99) v1@1414.35,933.64 ; 1400,918.35 cw(c1415.2,918.35) v1@1414.04,933.5 ; 1433.5,846.5 1432,845 1432,792 1432,790 ; 1444,859 1400,903 1400,927 1392,935 ; v1(1465,711) 1465,673 1490,648 1490,462 1532,420 1573,420 1616,377 1635,377 ; 1522,654 1540,672 1540,678 ; 1540,585 1540,678 ; 1550.5,752.5 1550,753 1452,753 1410.14,794.87 ; 1553,611 1568,626 1568,722 1610,764 ; 1553,695 1561,695 1610,744 1610,764 ; v1(1578,96) 1578,114 1591,127 ; 1590,96 1603,109 1603,145 1603,163 ; v1@1597,103 1593,103 ; 1603,124 1603,123 v1@1583,103 ; 1603,155 1603,139 1591,127 ; v1(1607,106) 1630,106 1633,109 1633,159 1659,185 1659,202 ; 1635,452 1635,430 1635,377 ; 1647,431 1647,378 1647,207 1635,195 ; 1373,870.87 1400,843.87 ; 1373,870.87 1373,948 v1(1360,961) 1391,961 1414,938 v1(1414,934) ; 1373,870.87 1373,850 1400,823 1400,805 ; 1392,885 1392,868 1406,854 1410.14,854 ; 1392,885 1392,935 ; 1392,885 1423,854 1426,854 ; 1400,805 1410.14,794.87 ; 1400,805 1400,843.87 ; 1400,843.87 1410.14,854 ; 1410.14,794.87 1410.14,854 ; 1410.14,854 1426,854 ; v1(1414,934) 1414,900 1444,870 1444,836 ; 1426,854 1426,796 1432,790 ; 1426,854 1444,836 ; 1432,790 1460,762 1518,762 ; 1444,836 1444,817 1444,795 1464.5,774.5 1572.5,774.5 ; 1518,762 1560,762 ; 1518,762 1518,749 1540,727 ; 1540,678 1540,727 ; 1540,727 1540,742 1560,762 ; 1560,762 1572.5,774.5 ; 1572.5,774.5 1601,803 ; v1@1578,96.5 ccw(c1578,126.68) v1@1599.34,105.34 ; v1@1578,96.5 ccw(c1578,126.68) v1@1599.34,105.34 ; v1@1578,96.5 ccw(c1578,126.68) v1@1599.34,105.34 ; v1@1578.35,95.65 cw(c1596.11,77.89) 1596.11,103 ; v1@1578.35,95.65 cw(c1596.11,77.89) 1596.11,103 ; v1@1578.35,95.65 cw(c1596.11,77.89) 1596.11,103 ; v1@1578.35,95.65 cw(c1596.11,77.89) 1596.11,103 ; v1@1578.35,95.65 cw(c1596.11,77.89) 1596.11,103 ; v1@1578.35,95.65 cw(c1596.11,77.89) 1596.11,103 ; v1@1578.4,95.7 cw(c1593,84.75) 1593,103 ; v1@1578.4,95.7 cw(c1593,84.75) 1593,103 ; v1@1578.4,95.7 cw(c1593,84.75) 1593,103 ; v1@1578.4,95.7 cw(c1593,84.75) 1593,103 ; v1@1578.4,95.7 cw(c1593,84.75) 1593,103 ; v1@1578.4,95.7 cw(c1593,84.75) 1593,103 ; v1@1578.5,96.01 cw(c1621.19,96.81) 1591,127 ; v1@1578.5,96.01 cw(c1621.19,96.81) 1591,127 ; v1@1578.5,96.01 cw(c1621.19,96.81) 1591,127 ; v1@1583,103 1593,103 ; v1@1583,103 1619,103 1619,162 ; 1591,127 1591,151 1603,163 ; 1591.78,127.78 cw(c1608,111.57) v1@1608,134.5 ; 1591.78,127.78 cw(c1608,111.57) v1@1608,134.5 ; 1591.78,127.78 cw(c1608,111.57) v1@1608,134.5 ; 1591.78,127.78 cw(c1608,111.57) v1@1608,134.5 ; 1591.78,127.78 cw(c1608,111.57) v1@1608,134.5 ; 1591.78,127.78 cw(c1608,111.57) v1@1608,134.5 ; 1591.78,127.78 cw(c1608,111.57) v1@1608,134.5 ; 1591.78,127.78 cw(c1608,111.57) v1@1608,134.5 ; 1591.78,127.78 cw(c1608,111.57) v1@1608,134.5 ; 1594.2,100.2 cw(c1607,87.39) v1@1607,105.5 ; 1594.2,100.2 cw(c1607,87.39) v1@1607,105.5 ; 1594.2,100.2 cw(c1607,87.39) v1@1607,105.5 ; 1601,803 1610,812 ; 1601,803 1601,844 v1(1610,853) ; 1602.2,122.2 ccw(c1589.39,135) v1@1607.5,135 ; 1602.2,122.2 ccw(c1589.39,135) v1@1607.5,135 ; 1602.2,122.2 ccw(c1589.39,135) v1@1607.5,135 ; 1603,116.86 ccw(c1617.86,116.86) v1@1607.35,106.35 ; 1603,116.86 ccw(c1617.86,116.86) v1@1607.35,106.35 ; 1603,116.86 ccw(c1617.86,116.86) v1@1607.35,106.35 ; 1603,116.86 ccw(c1617.86,116.86) v1@1607.35,106.35 ; 1603,116.86 ccw(c1617.86,116.86) v1@1607.35,106.35 ; 1603,116.86 ccw(c1617.86,116.86) v1@1607.35,106.35 ; 1603,116.86 ccw(c1617.86,116.86) v1@1607.35,106.35 ; 1603,116.86 ccw(c1617.86,116.86) v1@1607.35,106.35 ; 1603,116.86 ccw(c1617.86,116.86) v1@1607.35,106.35 ; 1603,121.72 cw(c1621.28,121.72) v1@1608.35,134.65 ; 1603,121.72 cw(c1621.28,121.72) v1@1608.35,134.65 ; 1603,121.72 cw(c1621.28,121.72) v1@1608.35,134.65 ; 1603,122 cw(c1620.61,122) v1@1608.35,134.64 ; 1603,122 cw(c1620.61,122) v1@1608.35,134.64 ; 1603,122 cw(c1620.61,122) v1@1608.35,134.64 ; 1603,122.92 cw(c1618.52,122.92) v1@1608.33,134.62 ; 1603,122.92 cw(c1618.52,122.92) v1@1608.33,134.62 ; 1603,122.92 cw(c1618.52,122.92) v1@1608.33,134.62 ; 1603,148.28 ccw(c1621.28,148.28) v1@1608.35,135.35 ; 1603,148.28 ccw(c1621.28,148.28) v1@1608.35,135.35 ; 1603,148.28 ccw(c1621.28,148.28) v1@1608.35,135.35 ; 1603,148.28 ccw(c1621.28,148.28) v1@1608.35,135.35 ; 1603,148.28 ccw(c1621.28,148.28) v1@1608.35,135.35 ; 1603,148.28 ccw(c1621.28,148.28) v1@1608.35,135.35 ; 1603,163 1635,195 ; v1@1606.65,106.35 ccw(c1576.82,136.18) 1619,136.18 ; v1@1606.65,106.35 ccw(c1576.82,136.18) 1619,136.18 ; v1@1606.65,106.35 ccw(c1576.82,136.18) 1619,136.18 ; v1@1607.65,134.65 cw(c1580.24,107.24) 1619,107.24 ; v1@1607.65,134.65 cw(c1580.24,107.24) 1619,107.24 ; v1@1607.65,134.65 cw(c1580.24,107.24) 1619,107.24 ; v1@1607.65,135.36 ccw(c1582.06,162) 1619,162 ; v1@1607.65,135.36 ccw(c1582.06,162) 1619,162 ; v1@1607.65,135.36 ccw(c1582.06,162) 1619,162 ; 1610,764 1610,812 ; 1610,789 1610,812 ; 1610,789 1553,732 1553,584 1553,534 1535,516 1535,479 1555,459 1642,459 1659,442 1659,432 1659,202 ; 1610,789 1610,802 1623,815 1623,836 1610,849 v1(1610,853) ; 1610,812 v1(1610,853) ; 1619,162 1647,190 1659,202 ; 1635,195 1635,377
  Bottom Layer w12: C22.1@1410.14,825.37 1410.14,877.37 ; U7.6@1415,760 1415,792 C22.1@1415,820.51 ; v1(1465,711) U7.8@1465,760 ; C28.1@1398.14,886.64 cw(c1369.17,857.67) 1410.14,857.67 ; C28.1@1398.14,886.64 cw(c1369.17,857.67) 1410.14,857.67 ; C28.1@1398.14,886.64 cw(c1369.17,857.67) 1410.14,857.67 ; C22.1@1406.86,828.64 ccw(c1398.96,836.55) 1410.13,836.55 ; C22.1@1406.86,828.64 ccw(c1398.96,836.55) 1410.13,836.55 ; C22.1@1406.86,828.64 ccw(c1398.96,836.55) 1410.13,836.55 ; 1406.95,850.82 cw(c1399.27,843.14) 1410.14,843.14 ; 1406.95,850.82 cw(c1399.27,843.14) 1410.14,843.14 ; 1406.95,850.82 cw(c1399.27,843.14) 1410.14,843.14 ; 1406.95,857.18 ccw(c1399.27,864.86) 1410.14,864.86 ; 1406.95,857.18 ccw(c1399.27,864.86) 1410.14,864.86 ; 1406.95,857.18 ccw(c1399.27,864.86) 1410.14,864.86 ; C22.1@1407.37,822.1 cw(c1388.94,803.67) 1415,803.67 ; C22.1@1407.37,822.1 cw(c1388.94,803.67) 1415,803.67 ; C22.1@1407.37,822.1 cw(c1388.94,803.67) 1415,803.67 ; 1410.14,836.55 ccw(c1421.31,836.55) C22.1@1413.41,828.64 ; 1410.14,836.55 ccw(c1421.31,836.55) C22.1@1413.41,828.64 ; 1410.14,836.55 ccw(c1421.31,836.55) C22.1@1413.41,828.64
  Bottom Layer w20: v1@1360.49,960.88 ccw(c1380.81,955.81) v1@1366,941 ; v1@1373.3,934.4 cw(c1393.25,961) v1(1360,961) ; 1385.5,945.5 ccw(c1412.16,972.16) v1@1413.98,934.5 ; C28.1@1404.5,893 1404.5,926.5 1397,934 ; 1404.5,909.86 cw(c1438.14,909.86) v1@1414.35,933.65 ; C22.1@1406.86,828.64 C22.1@1404.5,831.01 ; 1411,810 1404.5,816.5 C22.1@1404.5,831.01 ; v1(1414,934) 1414,938 1391,961 1377,961 ; P1.2@1600.04,34.61 1600.04,96.96 1593,104 ; 1600.04,76 1590,96 ; v1(1608,135) v1@1608,130 ; v1@1610,133 v1@1610,116 ; v1(1360,961) 1360,947 v1(1373,934) ; v1(1360,961) 1377,961 ; v1(1373,934) 1397,934 ; v1(1373,934) 1402,905 1404.5,905 C22.1@1404.5,831.01 ; 1377,961 1377,954 1397,934 ; v1@1577.85,95.52 cw(c1566.53,60.31) 1599.58,76.91 ; v1@1577.85,95.52 cw(c1566.53,60.31) 1599.58,76.91 ; v1@1577.85,95.52 cw(c1566.53,60.31) 1599.58,76.91 ; v1@1577.84,95.53 cw(c1565.94,59.62) 1599.74,76.59 ; v1@1577.84,95.53 cw(c1565.94,59.62) 1599.74,76.59 ; v1@1577.84,95.53 cw(c1565.94,59.62) 1599.74,76.59 ; v1@1578,95.5 cw(c1578,65.32) 1599.34,86.66 ; v1@1578,95.5 cw(c1578,65.32) 1599.34,86.66 ; v1@1578,95.5 cw(c1578,65.32) 1599.34,86.66 ; v1@1578,96.5 ccw(c1578,126.68) v1@1599.34,105.34 ; v1@1578,96.5 ccw(c1578,121.85) 1595.92,103.92 ; v1@1578,96.5 ccw(c1578,121.85) 1595.92,103.92 ; v1@1578,96.5 ccw(c1578,114.61) 1590.8,101.8 ; v1@1578,96.5 ccw(c1578,114.61) 1590.8,101.8 ; v1@1578,96.5 ccw(c1578,126.68) v1@1599.34,105.34 ; v1@1578,96.5 ccw(c1578,121.85) 1595.92,103.92 ; v1@1578,96.5 ccw(c1578,121.85) 1595.92,103.92 ; v1@1578,96.5 ccw(c1578,114.61) 1590.8,101.8 ; v1@1578,96.5 ccw(c1578,114.61) 1590.8,101.8 ; v1@1578,96.5 ccw(c1578,126.68) v1@1599.34,105.34 ; v1@1578,96.5 ccw(c1578,121.85) 1595.92,103.92 ; v1@1578,96.5 ccw(c1578,121.85) 1595.92,103.92 ; v1@1578,96.5 ccw(c1578,114.61) 1590.8,101.8 ; v1@1578,96.5 ccw(c1578,114.61) 1590.8,101.8 ; v1@1578.09,95.51 cw(c1581.84,75.85) 1596,90 ; v1@1578.09,95.51 cw(c1581.84,75.85) 1596,90 ; v1@1578.09,95.51 cw(c1581.84,75.85) 1596,90 ; v1@1578.26,95.57 cw(c1589.44,77.44) 1604.5,92.5 ; v1@1578.26,95.57 cw(c1589.44,77.44) 1604.5,92.5 ; v1@1578.26,95.57 cw(c1589.44,77.44) 1604.5,92.5 ; v1@1578.35,96.35 ccw(c1588.86,106.86) 1588.86,92 ; v1@1578.35,96.35 ccw(c1588.86,106.86) 1588.86,92 ; v1@1578.35,96.35 ccw(c1588.86,106.86) 1588.86,92 ; v1@1578.35,96.35 ccw(c1588.86,106.86) 1588.86,92 ; v1@1578.35,96.35 ccw(c1588.86,106.86) 1588.86,92 ; v1@1578.35,96.35 ccw(c1588.86,106.86) 1588.86,92 ; v1@1578.39,95.68 cw(c1596,81.19) 1596,104 ; v1@1578.39,95.68 cw(c1596,81.19) 1596,104 ; v1@1578.39,95.68 cw(c1596,81.19) 1596,104 ; v1@1578.43,95.74 cw(c1593,87.02) 1593,104 ; v1@1578.43,95.74 cw(c1593,87.02) 1593,104 ; v1@1578.43,95.74 cw(c1593,87.02) 1593,104 ; v1@1582,104 v1@1608,130 ; v1@1582,104 1596,104 ; v1@1582,104 1593,104 ; v1@1584,96 ccw(c1584,125.94) v1@1606.62,106.33 ; v1@1584,96 ccw(c1584,125.94) v1@1606.62,106.33 ; v1@1584,96 ccw(c1584,125.94) v1@1606.62,106.33 ; v1@1584,96 1590,96 ; v1@1587,98 cw(c1605.25,79.75) v1@1606.97,105.5 ; v1@1587,98 cw(c1605.25,79.75) v1@1606.97,105.5 ; v1@1587,98 cw(c1605.25,79.75) v1@1606.97,105.5 ; 1590,96 ccw(c1590,114.51) v1@1606.55,106.22 ; 1590,96 ccw(c1590,114.51) v1@1606.55,106.22 ; 1590,96 ccw(c1590,114.51) v1@1606.55,106.22 ; 1590,96 1594,92 1608,92 1608,105 1610,107 v1@1610,116 ; 1590,96 v1@1610,116 ; 1591.5,99.5 cw(c1606.04,84.96) v1@1606.98,105.5 ; 1591.5,99.5 cw(c1606.04,84.96) v1@1606.98,105.5 ; 1591.5,99.5 cw(c1606.04,84.96) v1@1606.98,105.5 ; 1593,104 1610,121 ; 1594.2,100.2 cw(c1607,87.39) v1@1607,105.5 ; 1594.2,100.2 cw(c1607,87.39) v1@1607,105.5 ; 1594.2,100.2 cw(c1607,87.39) v1@1607,105.5 ; 1596,104 1610,118 ; 1600.04,87.99 cw(c1625.01,87.99) v1@1607.35,105.65 ; 1600.04,87.99 cw(c1625.01,87.99) v1@1607.35,105.65 ; 1600.04,87.99 cw(c1625.01,87.99) v1@1607.35,105.65 ; v1@1600.5,106.5 ccw(c1580.5,126.5) v1@1607.52,134.85 ; v1@1600.5,106.5 ccw(c1580.5,126.5) v1@1607.52,134.85 ; v1@1600.5,106.5 ccw(c1580.5,126.5) v1@1607.52,134.85 ; v1@1601,112 ccw(c1583.71,129.29) v1@1607.51,134.89 ; v1@1601,112 ccw(c1583.71,129.29) v1@1607.51,134.89 ; v1@1601,112 ccw(c1583.71,129.29) v1@1607.51,134.89 ; v1@1605.5,113.5 ccw(c1593.62,125.38) v1@1607.58,134.72 ; v1@1605.5,113.5 ccw(c1593.62,125.38) v1@1607.58,134.72 ; v1@1605.5,113.5 ccw(c1593.62,125.38) v1@1607.58,134.72 ; v1@1607.37,106.33 cw(c1620.16,117.84) v1@1608,130 ; v1@1607.37,106.33 cw(c1620.16,117.84) v1@1608,130 ; v1@1607.37,106.33 cw(c1620.16,117.84) v1@1608,130 ; v1@1607.47,106.18 cw(c1617.87,110.13) 1610,118 ; v1@1607.45,106.21 cw(c1619.2,111.8) 1610,121 ; v1@1607.47,106.18 cw(c1617.87,110.13) 1610,118 ; v1@1607.45,106.21 cw(c1619.2,111.8) 1610,121 ; v1@1607.47,106.18 cw(c1617.87,110.13) 1610,118 ; v1@1607.45,106.21 cw(c1619.2,111.8) 1610,121 ; v1@1610,116 1610,121 ; v1@1360,960.5 cw(c1360,935.15) 1377.92,953.08 ccw(c1360,935.15) v1@1360,960.5 ; v1@1372.65,934.35 ccw(c1362.14,944.86) 1377,944.86 cw(c1362.14,944.86) v1@1372.65,934.35